# Altium PCB PCB5.PcbDoc
Units mil, origin at the board's own origin, x right, y up, seen from the top; angles counter-clockwise.
Board outline 2050 x 1100 mil, 2 copper layers (Top Layer, Bottom Layer); 12 components, 8 nets, 30 pads, 0 vias.
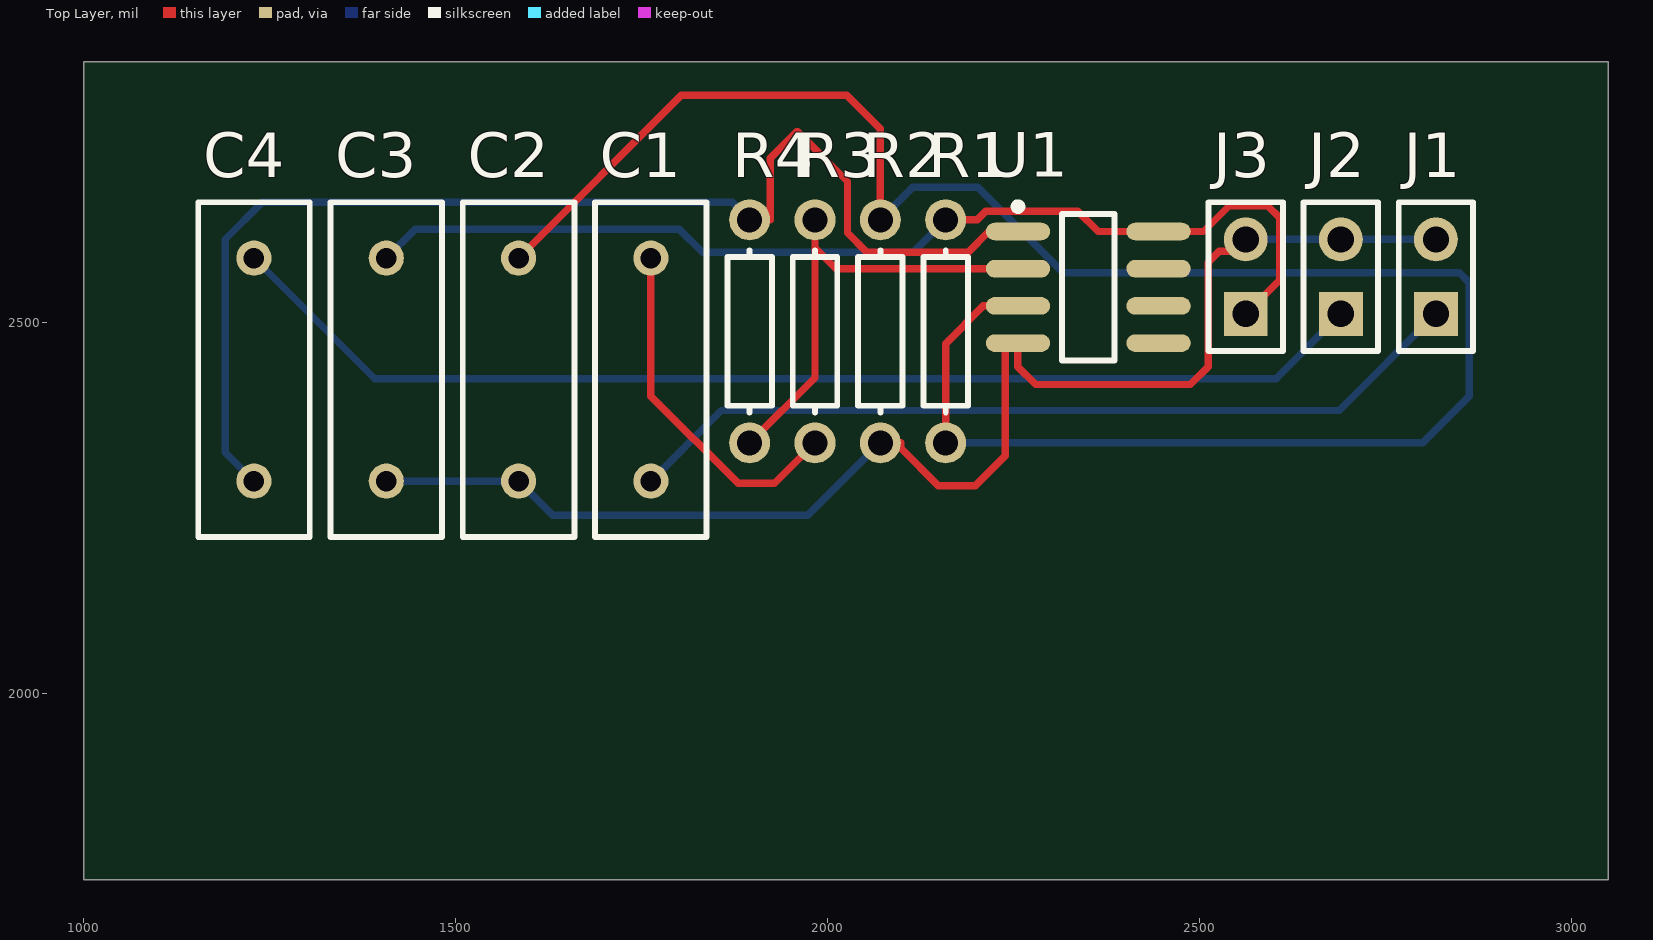
[diagram p0: Top Layer view]
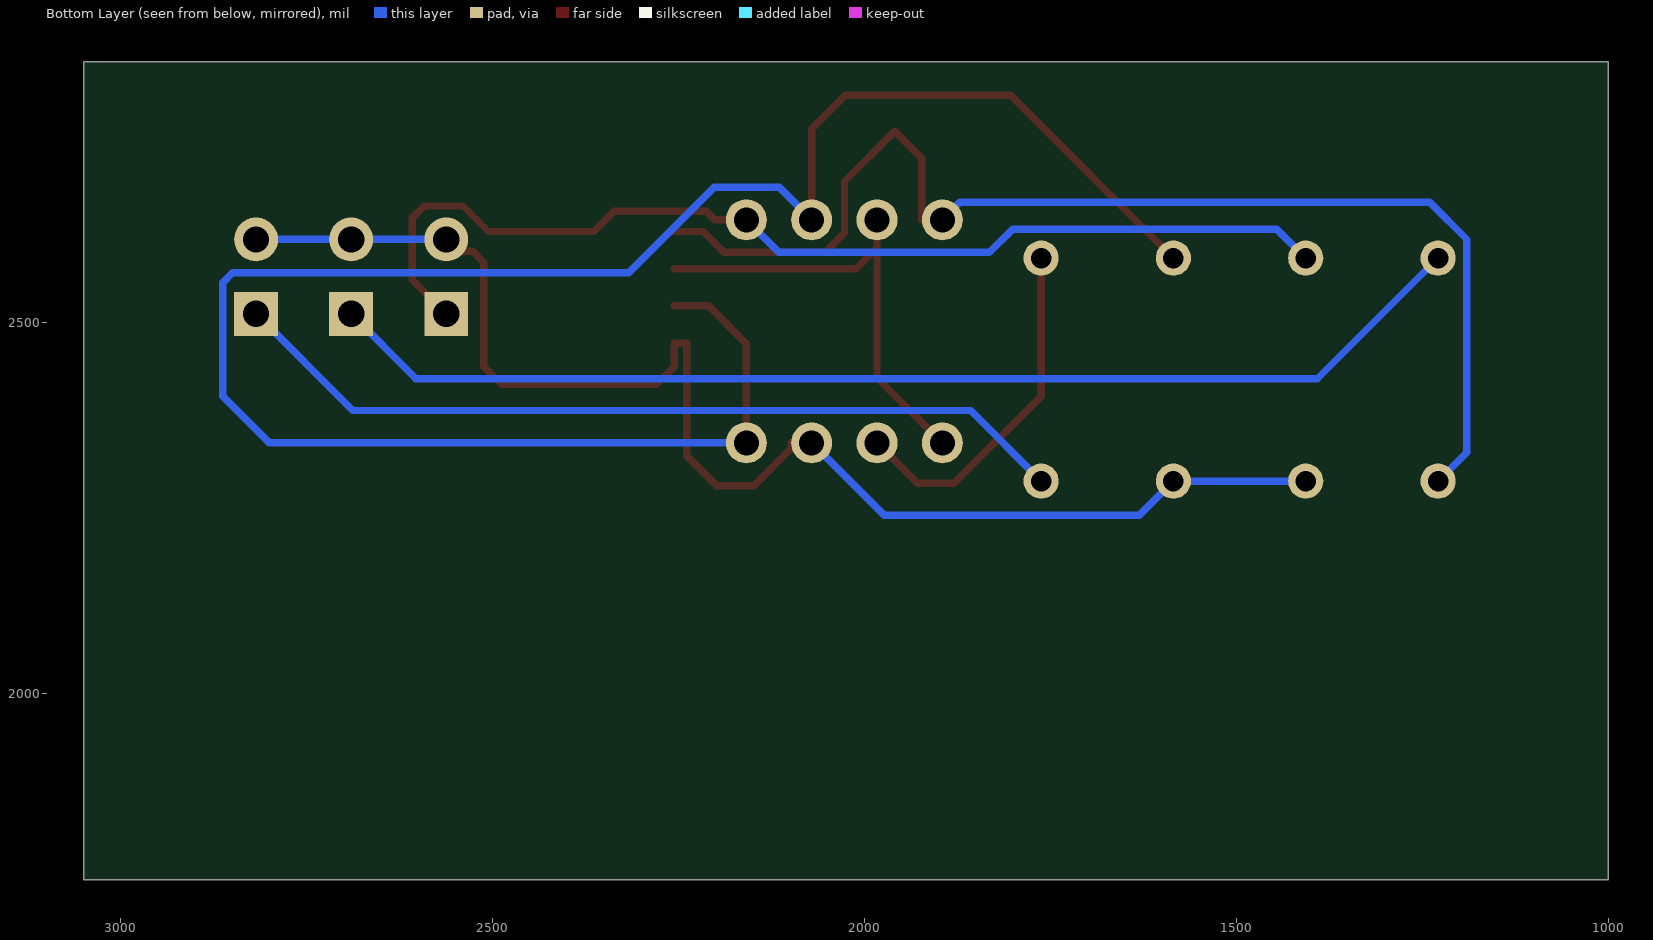
[diagram p1: Bottom Layer view, seen from below]

## Layer stack, top to bottom
Top Solder: solder mask 0.4, Solder Resist, Dk 3.5
Top Layer: signal copper 1.4
Dielectric 1: dielectric 12.6, FR-4, Dk 4.8
Bottom Layer: signal copper 1.4
Bottom Solder: solder mask 0.4, Solder Resist, Dk 3.5

## Board outline
1000,1750 3050,1750 3050,2850 1000,2850

## Design rules (kind name [scope] priority, off if disabled: settings)
Clearance [All] p1: gap=10 ignorepadtopadclearanceinfootprint=FALSE
PolygonConnect [All] p1: connectstyle=Relief reliefconductorwidth=10 reliefentries=4 polygonreliefangle="90 Angle" airgapwidth=10
RoutingVias [All] p1: holewidth=28 width=50 viastyle="Through Hole" minholewidth=28 minwidth=50 maxholewidth=28 maxwidth=50
SolderMaskExpansion [All] p1: expansion=0 istentingtop=FALSE
SupplyNets "Schematic Supply Nets_1" [InNet('GND')] p1: voltage=0.000
SupplyNets "Schematic Supply Nets" [InNet('VCC')] p2: voltage=0.000
Width [All] p1: maxlimit=10 minlimit=10 preferedwidth=10
30 further rules are at their usual default settings.

## Components (designator, comment, footprint, x,y, rotation, side; value= is the part's Value field where it differs from the comment)
C1 "Cap" RAD-0.3 1762.56,2436.06 r90 top value=1uF
C2 "Cap" RAD-0.3 1584.68,2436.06 r90 top value=10uF
C3 "Cap" RAD-0.3 1406.81,2436.06 r90 top value=100nF
C4 "Cap" RAD-0.3 1228.94,2436.06 r90 top value=1uF
J1 "Header 2" HDR1X2 2818.27,2511.06 r90 top
J2 "Header 2" HDR1X2 2690.39,2511.06 r90 top
J3 "Header 2" HDR1X2 2562.52,2511.06 r90 top
R1 "Res1" AXIAL-0.3 2159.05,2487.44 r90 top value=10k
R2 "Res1" AXIAL-0.3 2071.18,2487.44 r90 top value=10k
R3 "Res1" AXIAL-0.3 1983.31,2487.44 r90 top value=1k
R4 "Res1" AXIAL-0.3 1895.43,2487.44 r90 top value=10k
U1 "TL072" SO8_N 2350.79,2546.69 r0 top

## Footprints (in the part's own frame and the unit in brackets; to place one, negate y for a bottom-side part, rotate by r counter-clockwise, add the part's x,y. Pads: shape width x height; smd on the part's side, far side on the other; paste and mask are expansions set on the pad)
AXIAL-0.3 [mm] "Axial Device, Thru-Hole; 2 Leads; 0.3 in Pin Spacing"
  round 1.4 hole 0.85: 1(-3.81,0) 2(3.81,0)
  silkscreen extent -2.77,-0.76 2.77,0.76
HDR1X2 [mm] "Connector; Header; 2 Position"
  rect 1.5x1.5 hole 0.9: 1(0,0)
  round 1.5 hole 0.9: 2(2.54,0)
  silkscreen extent -1.27,-1.27 3.81,1.27
RAD-0.3 [mm] "Radial Cap, Thru-Hole; 2 Leads; 0.3 in Pin Spacing"
  round 1.2 hole 0.7: 1(-3.81,0) 2(3.81,0)
  silkscreen extent -5.71,-1.91 5.72,1.9
SO8_N [mm] "SOIC, 8-Leads, Body 4.9x3.9mm, Pitch 1.27mm, IPC Medium Density"
  oval 2.2x0.6 smd: 1(-2.4,1.905) 2(-2.4,0.635) 3(-2.4,-0.635) 4(-2.4,-1.905) 5(2.4,-1.905) 6(2.4,-0.635) 7(2.4,0.635) 8(2.4,1.905)
  silkscreen extent -2.52,-2.5 0.9,2.88, body extent -2,-2.5 2,2.5, height 1.75

## Part data
C1 C4: "Ceramic capacitor 1uF", Manufacturer=KEMET, Manufacturer Part Number=C320C105K5R5TA, LatestRevisionDate=17-Jul-2002, LatestRevisionNote="Re-released for DXP Platform.", PackageDescription="Radial Cap, Thru-Hole; 2 Leads; 0.3 in Pin Spacing", PackageReference=RAD-0.3, Published=8-Jun-2000, Publisher="Altium Limited"
C2: "Ceramic capacitor 10uF", Manufacturer=KEMET, Manufacturer Part Number=C320C106K3R5TA, LatestRevisionDate=17-Jul-2002, LatestRevisionNote="Re-released for DXP Platform.", PackageDescription="Radial Cap, Thru-Hole; 2 Leads; 0.3 in Pin Spacing", PackageReference=RAD-0.3, Published=8-Jun-2000, Publisher="Altium Limited"
C3: "Ceramic capacitor 100nF", Manufacturer=KEMET, Manufacturer Part Number=C320C104K5R5TA, LatestRevisionDate=17-Jul-2002, LatestRevisionNote="Re-released for DXP Platform.", PackageDescription="Radial Cap, Thru-Hole; 2 Leads; 0.3 in Pin Spacing", PackageReference=RAD-0.3, Published=8-Jun-2000, Publisher="Altium Limited"
J1: "Header 2 pin 2.54 mm: signal input (IN, GND)", Manufacturer=Generic, Manufacturer Part Number="Pin header 1x2", LatestRevisionDate=17-Jul-2002, LatestRevisionNote="Re-released for DXP Platform.", Publisher="Altium Limited"
J2: "Header 2 pin 2.54 mm: signal output (OUT, GND)", Manufacturer=Generic, Manufacturer Part Number="Pin header 1x2", LatestRevisionDate=17-Jul-2002, LatestRevisionNote="Re-released for DXP Platform.", Publisher="Altium Limited"
J3: "Header 2 pin 2.54 mm: supply input (VCC 5 V, GND)", Manufacturer=Generic, Manufacturer Part Number="Pin header 1x2", LatestRevisionDate=17-Jul-2002, LatestRevisionNote="Re-released for DXP Platform.", Publisher="Altium Limited"
R1 R2 R4: "Resistor 10k 1/4 W 5%", Manufacturer=Yageo, Manufacturer Part Number=CFR-25JB-52-10K, LatestRevisionDate=17-Jul-2002, LatestRevisionNote="Re-released for DXP Platform.", PackageDescription="Axial Device, Thru-Hole; 2 Leads; 0.3 in Pin Spacing", PackageReference=AXIAL-0.3, Published=8-Jun-2000, Publisher="Altium Limited"
R3: "Resistor 1k 1/4 W 5%", Manufacturer=Yageo, Manufacturer Part Number=CFR-25JB-52-1K, LatestRevisionDate=17-Jul-2002, LatestRevisionNote="Re-released for DXP Platform.", PackageDescription="Axial Device, Thru-Hole; 2 Leads; 0.3 in Pin Spacing", PackageReference=AXIAL-0.3, Published=8-Jun-2000, Publisher="Altium Limited"
U1: "TL072 dual JFET op-amp (A, B) + power part C, SOIC-8", Manufacturer="Texas Instruments", Manufacturer Part Number=TL072CDR

## Nets (pads, with @x,y where several pads share a name; then routed paths per layer and width w, separated by ;. In a path a pad name is that pad's centre, name@x,y a point inside that pad or via, vN(x,y) a via of type N, cw(c..) or ccw(c..) an arc to the next point about the centre after c; other vN are vias at no path point)
C1B: C1.2 R3.1 | length 477.6
  Top Layer w10: C1.2 1762.56,2400.44 1880,2283 1928.87,2283 R3.1
GND: C2.1 C3.1 J1.2 J2.2 J3.2 R2.1 U1.4 | length 1881.5
  Top Layer w10: R2.1 2099,2337.44 2099,2330 2149,2280 2199,2280 2239,2320 2239,2471.69 U1.4@2256,2471.69 ; U1.4 U1.4@2256,2471.69 ; J3.2 2562.52,2595 2527,2595 2512,2580 2512,2440 2488,2416 2280,2416 2256,2440 U1.4@2256,2471.69
  Bottom Layer w10: C3.1 C2.1 1630.75,2240 1973.74,2240 R2.1 ; J3.2 J2.2 J1.2
IN: C1.1 J1.1 | length 1148.9
  Bottom Layer w10: C1.1 1857.5,2381 2688.2,2381 J1.1
INV: R3.2 R4.1 U1.2 | length 621.1
  Top Layer w10: R4.1 1983.31,2425.32 1983.31,2600 ; R3.2 1983.31,2600 ; U1.2 2011.62,2571.69 1983.31,2600
OUT: C4.2 J2.1 | length 1564.6
  Bottom Layer w10: C4.2 1391,2424 2603.33,2424 J2.1
OUTA: C4.1 R4.2 U1.1 | length 1654.3
  Top Layer w10: R4.2 1923,2637.44 1923,2720 1959,2756 1960,2756 2027,2689 2027,2620 2053,2594 2189.31,2594 2217,2621.69 U1.1
  Bottom Layer w10: C4.1 1190,2325 1190,2611 1240,2661 1871.88,2661 R4.2
VCC: C3.2 J3.1 R1.2 U1.8 | length 1432.9
  Top Layer w10: R1.2 2201.44,2637.44 2213,2649 2336.69,2649 2364,2621.69 U1.8 2505.69,2621.69 2540,2656 2592,2656 2608,2640 2608,2556.54 J3.1
  Bottom Layer w10: C3.2 1445.75,2625 1801,2625 1832,2594 2115.61,2594 R1.2
VREF: C2.2 R1.1 R2.2 U1.3 | length 2715.9
  Top Layer w10: C2.2 1803.62,2805 2026.18,2805 2071.18,2760 R2.2 ; R1.1 2159.06,2471.06 2209.69,2521.69 U1.3
  Bottom Layer w10: R2.2 2114.74,2681 2202,2681 2317,2566 2850,2566 2863,2553 2863,2400 2800.44,2337.44 R1.1
pads on no net: U1.5 U1.6 U1.7